# EAGLE board antarctic penetrator avionics hw1 (EAGLE 7.5.0)

Size 100 x 80 mm. Coordinates in mm from the lower left corner, seen from the top.
Outline: 0,0 100,0 100,80 0,80 0,0
Copper layers (1*16): Top 0.035mm / dielectric 1.5mm / Bottom 0.035mm
Design rules "default": minimum track width 10mil, minimum drill 24mil, track to track 8mil, track to pad 8mil, pad to pad 8mil, via to via 8mil, smd to smd 8mil, copper to edge 40mil, drill to drill 8mil, minimum pad ring 10mil, minimum via ring 8mil, stop-mask expansion 4mil, vias tented up to drill 0mil, thermal gap 10mil

## Footprints (pad centres in the part's own frame; a part is rotated, then mirrored left to right if it is on the bottom)
MI20-50PD-SF = smd 0.41 x 3.75: 1 15.557,-18.78; 2 14.287,-18.78; 3 13.018,-18.78; 4 11.748,-18.78; 5 10.477,-18.78; 6 9.207,-18.78; 7 7.938,-18.78; 8 6.668,-18.78; 9 5.397,-18.78; 10 4.128,-18.78; 11 2.857,-18.78; 12 1.587,-18.78; 13 0.318,-18.78; 14 -0.953,-18.78; 15 -2.223,-18.78; 16 -3.493,-18.78; 17 -4.763,-18.78; 18 -6.032,-18.78; 19 -7.303,-18.78; 20 -8.572,-18.78; 21 -9.842,-18.78; 22 -11.113,-18.78; 23 -12.383,-18.78; 24 -13.652,-18.78; 25 -14.922,-18.78; 26 14.922,-18.78; 27 13.652,-18.78; 28 12.383,-18.78; 29 11.113,-18.78; 30 9.842,-18.78; 31 8.572,-18.78; 32 7.303,-18.78; 33 6.032,-18.78; 34 4.763,-18.78; 35 3.493,-18.78; 36 2.223,-18.78; 37 0.953,-18.78; 38 -0.318,-18.78; 39 -1.587,-18.78; 40 -2.857,-18.78; 41 -4.128,-18.78; 42 -5.397,-18.78; 43 -6.668,-18.78; 44 -7.938,-18.78; 45 -9.207,-18.78; 46 -10.477,-18.78; 47 -11.748,-18.78; 48 -13.018,-18.78; 49 -14.287,-18.78; 50 -15.557,-18.78 | smd 3.2 x 4: M1 -23.883,-0.005; M2 23.883,-0.005 | hole 1.676: 18.5,-12.25; -18.5,-12.25 | hole 1.422: -22.75,5.75; 22.75,5.75
MA06-1 = drill 1.016 long: 1 -6.35,0; 2 -3.81,0; 3 -1.27,0; 4 1.27,0; 5 3.81,0; 6 6.35,0
MA08-1 = drill 1.016 long: 1 -8.89,0; 2 -6.35,0; 3 -3.81,0; 4 -1.27,0; 5 1.27,0; 6 3.81,0; 7 6.35,0; 8 8.89,0
SL-340/SM3.6V = smd 3.81 x 4.826: + 0,13.589; - -5.08,-13.589; -@1 5.08,-13.589 | hole 5.2: 0,0
MA03-1 = drill 1.016 long: 1 -2.54,0; 2 0,0; 3 2.54,0
SOT23-5 = smd 0.6 x 1.2: 1 -0.95,-1.306; 2 0,-1.306; 3 0.95,-1.306; 4 0.95,1.306; 5 -0.95,1.306
TQFP100-14X14 = smd 0.9 x 0.34: 1 -7.85,6; 2 -7.85,5.5; 3 -7.85,5; 4 -7.85,4.5; 5 -7.85,4; 6 -7.85,3.5; 7 -7.85,3; 8 -7.85,2.5; 9 -7.85,2; 10 -7.85,1.5; 11 -7.85,1; 12 -7.85,0.5; 13 -7.85,0; 14 -7.85,-0.5; 15 -7.85,-1; 16 -7.85,-1.5; 17 -7.85,-2; 18 -7.85,-2.5; 19 -7.85,-3; 20 -7.85,-3.5; 21 -7.85,-4; 22 -7.85,-4.5; 23 -7.85,-5; 24 -7.85,-5.5; 25 -7.85,-6; 51 7.85,-6; 52 7.85,-5.5; 53 7.85,-5; 54 7.85,-4.5; 55 7.85,-4; 56 7.85,-3.5; 57 7.85,-3; 58 7.85,-2.5; 59 7.85,-2; 60 7.85,-1.5; 61 7.85,-1; 62 7.85,-0.5; 63 7.85,0; 64 7.85,0.5; 65 7.85,1; 66 7.85,1.5; 67 7.85,2; 68 7.85,2.5; 69 7.85,3; 70 7.85,3.5; 71 7.85,4; 72 7.85,4.5; 73 7.85,5; 74 7.85,5.5; 75 7.85,6 | smd 0.34 x 0.9: 26 -6,-7.85; 27 -5.5,-7.85; 28 -5,-7.85; 29 -4.5,-7.85; 30 -4,-7.85; 31 -3.5,-7.85; 32 -3,-7.85; 33 -2.5,-7.85; 34 -2,-7.85; 35 -1.5,-7.85; 36 -1,-7.85; 37 -0.5,-7.85; 38 0,-7.85; 39 0.5,-7.85; 40 1,-7.85; 41 1.5,-7.85; 42 2,-7.85; 43 2.5,-7.85; 44 3,-7.85; 45 3.5,-7.85; 46 4,-7.85; 47 4.5,-7.85; 48 5,-7.85; 49 5.5,-7.85; 50 6,-7.85; 76 6,7.85; 77 5.5,7.85; 78 5,7.85; 79 4.5,7.85; 80 4,7.85; 81 3.5,7.85; 82 3,7.85; 83 2.5,7.85; 84 2,7.85; 85 1.5,7.85; 86 1,7.85; 87 0.5,7.85; 88 0,7.85; 89 -0.5,7.85; 90 -1,7.85; 91 -1.5,7.85; 92 -2,7.85; 93 -2.5,7.85; 94 -3,7.85; 95 -3.5,7.85; 96 -4,7.85; 97 -4.5,7.85; 98 -5,7.85; 99 -5.5,7.85; 100 -6,7.85
0204/5 = drill 0.813 octagon: 1 -2.54,0; 2 2.54,0
MA10-1 = drill 1.016 long: 1 -11.43,0; 2 -8.89,0; 3 -6.35,0; 4 -3.81,0; 5 -1.27,0; 6 1.27,0; 7 3.81,0; 8 6.35,0; 9 8.89,0; 10 11.43,0

## Placement (x,y rotation side)
32GBCF  [MI20-50PD-SF]  -49.53,-63.5 0 top  (outside the outline)
ANALOG  [MA06-1]  8.89,-26.67 0 top  (outside the outline)
CURRENTS  [MA08-1]  -96.52,-204.47 0 top  (outside the outline)
G1  SL-340/SM3.6V  [SL-340/SM3.6V]  -95.25,-95.25 0 top  (outside the outline)
GPS  [MA03-1]  6.35,-20.32 0 top  (outside the outline)
IC2  INA168  [SOT23-5]  -3.81,-41.91 0 top  (outside the outline)
IC3  INA168  [SOT23-5]  -11.43,-41.91 0 top  (outside the outline)
IC6  INA168  [SOT23-5]  -34.29,-41.91 0 top  (outside the outline)
IC7  INA168  [SOT23-5]  -41.91,-41.91 0 top  (outside the outline)
IC8  INA168  [SOT23-5]  -49.53,-41.91 0 top  (outside the outline)
IC9  INA168  [SOT23-5]  -57.15,-41.91 0 top  (outside the outline)
IC10  INA168  [SOT23-5]  -64.77,-41.91 0 top  (outside the outline)
IC11  INA168  [SOT23-5]  -72.39,-41.91 0 top  (outside the outline)
IMU  [MA06-1]  8.89,-34.29 0 top  (outside the outline)
PSOC5  CY8C58LPXXX  [TQFP100-14X14]  60.96,44.45 0 top
R1  620Ω  [0204/5]  -78.74,-92.71 0 top  (outside the outline)
R2  620Ω  [0204/5]  -78.74,-96.52 0 top  (outside the outline)
R3  1Ω  [0204/5]  -78.74,-102.87 0 top  (outside the outline)
R4  250kΩ  [0204/5]  -78.74,-109.22 0 top  (outside the outline)
R5  1Ω  [0204/5]  -102.87,-115.57 0 top  (outside the outline)
R6  250kΩ  [0204/5]  -102.87,-121.92 0 top  (outside the outline)
R7  1Ω  [0204/5]  -102.87,-128.27 0 top  (outside the outline)
R8  250kΩ  [0204/5]  -102.87,-134.62 0 top  (outside the outline)
R9  1Ω  [0204/5]  -102.87,-140.97 0 top  (outside the outline)
R10  250kΩ  [0204/5]  -102.87,-147.32 0 top  (outside the outline)
R11  1Ω  [0204/5]  -102.87,-153.67 0 top  (outside the outline)
R12  250kΩ  [0204/5]  -102.87,-160.02 0 top  (outside the outline)
R13  250kΩ  [0204/5]  -102.87,-166.37 0 top  (outside the outline)
R14  1Ω  [0204/5]  -102.87,-172.72 0 top  (outside the outline)
R15  250kΩ  [0204/5]  -102.87,-179.07 0 top  (outside the outline)
R16  1Ω  [0204/5]  -102.87,-185.42 0 top  (outside the outline)
R17  250kΩ  [0204/5]  -102.87,-191.77 0 top  (outside the outline)
R18  1Ω  [0204/5]  -102.87,-198.12 0 top  (outside the outline)
SV2  [MA03-1]  -77.47,-87.63 0 top  (outside the outline)
TEMPERATURES  [MA10-1]  13.97,-41.91 0 top  (outside the outline)
TRANSCEIVER  [MA03-1]  6.35,-13.97 0 top  (outside the outline)

## Library data of the parts
32GBCF = con-hirose; OC_FARNELL: unknown; OC_NEWARK: unknown
ANALOG CURRENTS GPS IMU SV2 TEMPERATURES TRANSCEIVER = con-lstb; OC_FARNELL: unknown; OC_NEWARK: unknown
G1 = battery
IC2 IC3 IC6-IC11 = burr-brown; MF: TEXAS INSTRUMENTS; MPN: INA168NA/250; OC_FARNELL: 4375737; OC_NEWARK: 35C1744
PSOC5 = cypress
R1-R18 = rcl

## Nets
+5V: 32GBCF.36 IC2.5 IC3.5 IC6.5 IC7.5 IC8.5 IC9.5 IC10.5 IC11.5 R1.2 R2.2
GND: 32GBCF.9 32GBCF.39 G1.- GPS.1 IC2.2 IC2.4 IC3.2 IC3.4 IC6.2 IC7.2 IC8.2 IC9.2 IC10.2 IC11.2 PSOC5.14 R4.2 R6.2 R8.2 R10.2 R11.1 R12.2 R13.2 R14.1 R15.2 R17.2 TRANSCEIVER.1
GND1: 32GBCF.1
GND2: 32GBCF.50
GNDIO: IMU.4
I2CADDRESS: IMU.3 PSOC5.3
N$1: IC9.1 PSOC5.89 R6.1
N$3: IC11.1 PSOC5.85 R4.1
N$4: 32GBCF.41 PSOC5.76
N$5: CURRENTS.6 IC8.3 R16.2
N$6: CURRENTS.7 IC7.3 R9.2
N$7: CURRENTS.8 IC6.3 R7.2
N$8: CURRENTS.5 IC2.3 R11.2
N$9: CURRENTS.4 IC10.3 R18.2
N$10: CURRENTS.3 IC3.3 R14.2
N$11: CURRENTS.2 IC11.3 R3.1
N$12: 32GBCF.33 PSOC5.77
N$13: IC9.3 R5.2
N$14: 32GBCF.40 PSOC5.78
N$15: IC10.1 PSOC5.18 R17.1
N$16: IC3.1 PSOC5.19
N$17: IC7.1 PSOC5.6 R10.1
N$18: IC6.1 PSOC5.2 R8.1
N$19: IC8.1 PSOC5.7 R15.1
N$20: IC2.1 PSOC5.1 R12.1
N$21: 32GBCF.20 PSOC5.74
N$22: 32GBCF.19 PSOC5.73
N$23: 32GBCF.18 PSOC5.72
N$24: 32GBCF.7 PSOC5.71
N$25: 32GBCF.32 PSOC5.70
N$26: 32GBCF.34 PSOC5.69
N$27: 32GBCF.35 PSOC5.68
N$28: 32GBCF.42 PSOC5.67
N$29: 32GBCF.37 PSOC5.56
N$30: 32GBCF.46 PSOC5.55
N$31: 32GBCF.45 PSOC5.54
N$32: 32GBCF.31 PSOC5.53
N$33: 32GBCF.30 PSOC5.52
N$34: 32GBCF.29 PSOC5.51
N$36: 32GBCF.28 PSOC5.49
N$37: 32GBCF.27 PSOC5.48
N$38: 32GBCF.49 PSOC5.47
N$39: 32GBCF.48 PSOC5.46
N$40: 32GBCF.47 PSOC5.45
N$41: 32GBCF.6 PSOC5.44
N$42: 32GBCF.5 PSOC5.43
N$43: 32GBCF.4 PSOC5.42
N$44: 32GBCF.3 PSOC5.36
N$45: 32GBCF.2 PSOC5.35
N$46: 32GBCF.23 PSOC5.34
N$47: 32GBCF.22 PSOC5.33
N$49: 32GBCF.21 PSOC5.32
N$53: G1.+ IC6.4 IC7.4 IC8.4 IC9.4 IC10.4 IC11.4 R3.2 R5.1 R7.1 R9.1 R16.1 R18.1
PS0: IMU.6
PS1: IMU.5
RX: GPS.2 PSOC5.9 TRANSCEIVER.2
SCL: IMU.2 PSOC5.4 R2.1
SDA: IMU.1 PSOC5.5 R1.1
SEIS1: ANALOG.3 PSOC5.23
SEIS2: ANALOG.2 PSOC5.24
SEIS3: ANALOG.1
T1: PSOC5.99 TEMPERATURES.1
T2: PSOC5.98 TEMPERATURES.2
T3: PSOC5.97 TEMPERATURES.3
T4: PSOC5.96 TEMPERATURES.4
T5: TEMPERATURES.5
T6: PSOC5.94 TEMPERATURES.6
T7: PSOC5.93 TEMPERATURES.7
T8: PSOC5.92 TEMPERATURES.8
T9: TEMPERATURES.9
T10: PSOC5.90 TEMPERATURES.10
TX: GPS.3 PSOC5.16 TRANSCEIVER.3
VCC1: 32GBCF.38
VCC2: 32GBCF.13
VCCA: PSOC5.63
VCCD: PSOC5.39 PSOC5.86
VDDA: PSOC5.65
VDDD: PSOC5.37 PSOC5.88
VSSA: PSOC5.64
VSSB: PSOC5.10
VSSD: PSOC5.38 PSOC5.66 PSOC5.87
X-832M1: ANALOG.6 PSOC5.20
X-ADXL377: PSOC5.27 SV2.3
Y-832M1: ANALOG.5 PSOC5.21
Y-ADXL377: PSOC5.28 SV2.2
Z-832M1: ANALOG.4 PSOC5.22
Z-ADXL377: PSOC5.29 SV2.1

## Tracks (layer width: path | path; a pad name or v marks a point on that pad's centre or on a via)
+5V  (10 unrouted)
GND  (25 unrouted)
I2CADDRESS  (1 unrouted)
N$1  (2 unrouted)
N$3  (2 unrouted)
N$4  (1 unrouted)
N$5  (2 unrouted)
N$6  (2 unrouted)
N$7  (2 unrouted)
N$8  (2 unrouted)
N$9  (2 unrouted)
N$10  (2 unrouted)
N$11  (2 unrouted)
N$12  (1 unrouted)
N$13  (1 unrouted)
N$14  (1 unrouted)
N$15  (2 unrouted)
N$16  (1 unrouted)
N$17  (2 unrouted)
N$18  (2 unrouted)
N$19  (2 unrouted)
N$20  (2 unrouted)
N$21  (1 unrouted)
N$22  (1 unrouted)
N$23  (1 unrouted)
N$24  (1 unrouted)
N$25  (1 unrouted)
N$26  (1 unrouted)
N$27  (1 unrouted)
N$28  (1 unrouted)
N$29  (1 unrouted)
N$30  (1 unrouted)
N$31  (1 unrouted)
N$32  (1 unrouted)
N$33  (1 unrouted)
N$34  (1 unrouted)
N$36  (1 unrouted)
N$37  (1 unrouted)
N$38  (1 unrouted)
N$39  (1 unrouted)
N$40  (1 unrouted)
N$41  (1 unrouted)
N$42  (1 unrouted)
N$43  (1 unrouted)
N$44  (1 unrouted)
N$45  (1 unrouted)
N$46  (1 unrouted)
N$47  (1 unrouted)
N$49  (1 unrouted)
N$53  (12 unrouted)
RX  (2 unrouted)
SCL  (2 unrouted)
SDA  (2 unrouted)
SEIS1  (1 unrouted)
SEIS2  (1 unrouted)
T1  (1 unrouted)
T2  (1 unrouted)
T3  (1 unrouted)
T4  (1 unrouted)
T6  (1 unrouted)
T7  (1 unrouted)
T8  (1 unrouted)
T10  (1 unrouted)
TX  (2 unrouted)
VCCD  (1 unrouted)
VDDD  (1 unrouted)
VSSD  (2 unrouted)
X-832M1  (1 unrouted)
X-ADXL377  (1 unrouted)
Y-832M1  (1 unrouted)
Y-ADXL377  (1 unrouted)
Z-832M1  (1 unrouted)
Z-ADXL377  (1 unrouted)